# EAGLE board GPS receiver (EAGLE 6.5.0)
DESIGNER: theairboard.cc; REV: 1.0; SENSOR: GPS receiver
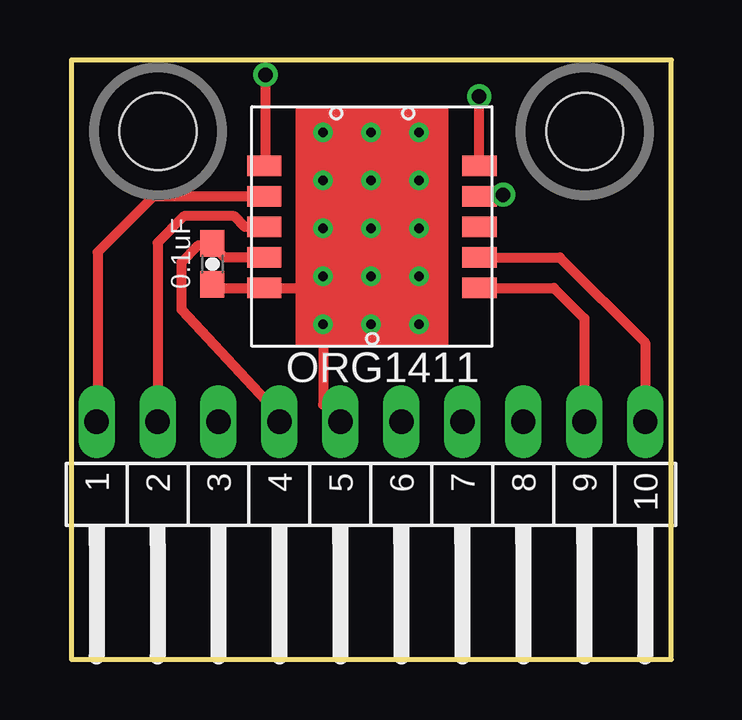
[diagram p0: board, top side]
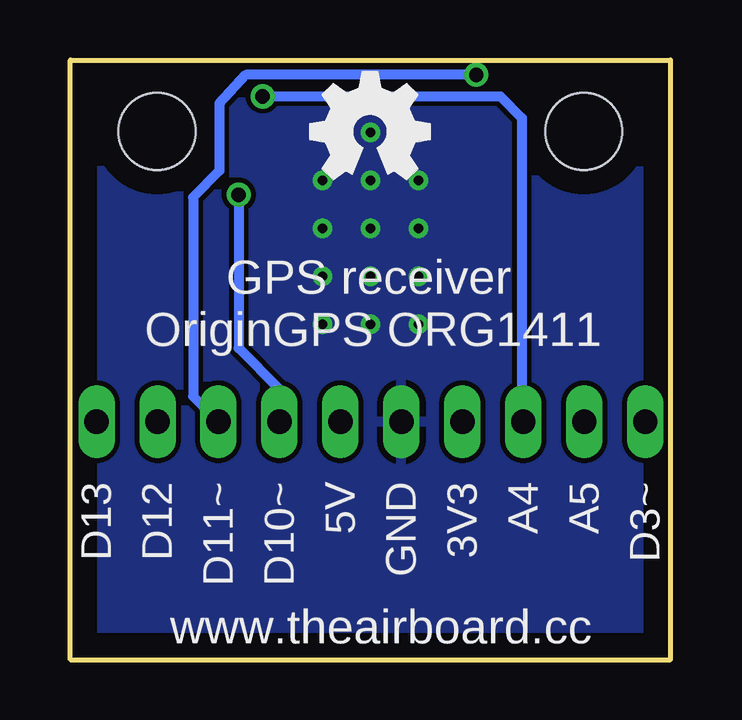
[diagram p1: board, bottom side, seen from below]

Size 25 x 25 mm. Coordinates in mm from the lower left corner, seen from the top.
Copper layers (1*16): Top 0.035mm / dielectric 1.5mm / Bottom 0.035mm
Design rules "default *": minimum track width 10mil, minimum drill 24mil, track to track 8mil, track to pad 8mil, pad to pad 8mil, via to via 8mil, smd to smd 8mil, copper to edge 40mil, drill to drill 8mil, minimum pad ring 10mil, minimum via ring 8mil, stop-mask expansion 4mil, vias tented up to drill 0.4mm, thermal gap 10mil

## Footprints (pad centres in the part's own frame; a part is rotated, then mirrored left to right if it is on the bottom)
0603-CAP = smd 1.1 x 1: 1 -0.85,0; 2 0.85,0
SIL10-2.54MM = drill 1.016 long: 1 11.43,0; 2 8.89,0; 3 6.35,0; 4 3.81,0; 5 1.27,0; 6 -1.27,0; 7 -3.81,0; 8 -6.35,0; 9 -8.89,0; 10 -11.43,0
ORG1411 = smd 1.422 x 0.864: 1 0,0; 2 0,-1.27; 3 0,-2.54; 4 0,-3.81; 5 0,-5.08; 6 8.97,-5.08; 7 8.97,-3.81; 8 8.97,-2.54; 9 8.97,-1.27; 10 8.97,0
LAYOUT25X25 = hole 3.2: 21.61,22.275; 3.83,22.275

## Placement (x,y rotation side)
C1  0.1uF  [0603-CAP]  5.88,16.5 270 top
FRAME1  SCH_FRAME  [BOARD_FRAME]  -76.42,-72.64 0 top  (outside the outline)
JP1  SIL  [SIL10-2.54MM]  12.48,9.91 180 top
U2  ORG1411  [ORG1411]  8.03,20.58 0 top
U$1  [LAYOUT25X25]  -0.22,-0.25 0 top

## Library data of the parts
C1 = SparkFun
FRAME1 U$1 = theairboard
JP1 = theairboard; MANUFACTURER: FCI; OC_FARNELL: 1097958; OC_NEWARK: 93K5133; PART_NUMBER: 77315-818-36LF
U2 = theairboard; MANUFACTURER: OriginGPS; PART_NUMBER: ORG1411-PM04

## Nets
1PPS: JP1.1 U2.2
CTS: JP1.10 U2.7
GND: C1.2 JP1.5 U2.5
ONOFF: JP1.8 U2.1
RTS: JP1.7 U2.9
RX: JP1.3 U2.10
TX: JP1.2 U2.3
VCC: C1.1 JP1.4 U2.4
WUP: JP1.9 U2.6

## Tracks (layer width: path | path; a pad name or v marks a point on that pad's centre or on a via)
1PPS
  Top 0.406: U2.2 3.42,19.31 1.09,16.98 1.09,9.95 JP1.1
CTS
  Top 0.406: U2.7 20.35,16.77 23.91,13.21 JP1.10
GND  (via drill 0.4)
  Top 0.406: C1.2 6.03,15.5 U2.5 10.01,15.5 v10.49,15.98 v10.49,17.98 v10.49,19.98 v10.49,21.98 v12.49,21.98 | v12.49,21.98 v14.49,21.98 v14.49,19.98 v14.49,17.98 v14.49,15.98 v14.49,13.98 v12.49,13.98 v10.49,13.98 10.49,10.63 JP1.5 | v12.49,21.98 v12.49,19.98 v12.49,17.98 v12.49,15.98
  pour Bottom: -0.01,24.98 24.99,24.98 24.99,-0.02 -0.01,-0.02
ONOFF  (via drill 0.6)
  Top 0.406: U2.1 8.09,20.58 v8.09,24.38
  Bottom 0.406: v8.09,24.38 17.69,24.38 18.79,23.18 18.79,20.38 19.89,19.28 19.89,10.97 JP1.8 18.79,9.95
RTS  (via drill 0.6)
  Top 0.406: U2.9 17.92,19.31 v17.99,19.38
  Bottom 0.406: v17.99,19.38 17.99,12.98 16.29,11.28 JP1.7
RX  (via drill 0.6)
  Top 0.406: U2.10 16.99,20.58 v16.99,23.48
  Bottom 0.406: v16.99,23.48 7.09,23.48 6.19,22.58 6.19,9.97 JP1.3
TX
  Top 0.406: U2.3 7.23,18.04 6.79,18.48 4.69,18.48 3.59,17.38 JP1.2
VCC
  Top 0.406: U2.4 6.38,16.77 5.88,17.28 C1.1 5.81,17.28 5.29,17.28 4.59,16.58 4.59,14.58 8.67,10.2 JP1.4
WUP
  Top 0.406: U2.6 20.1,15.5 21.37,14.23 JP1.9

## Text on the board
bNames: OriginGPS ORG1411